# Altium PCB optic_fiber.PcbDoc
Units mil, origin at the board's own origin, x right, y up, seen from the top; angles counter-clockwise.
Board outline 1200 x 1690 mil, 4 copper layers (Top Layer, Layer 1, Layer 2, Bottom Layer), stack 21.709 mil thick; 12 components, 8 nets, 75 pads, 4 vias.
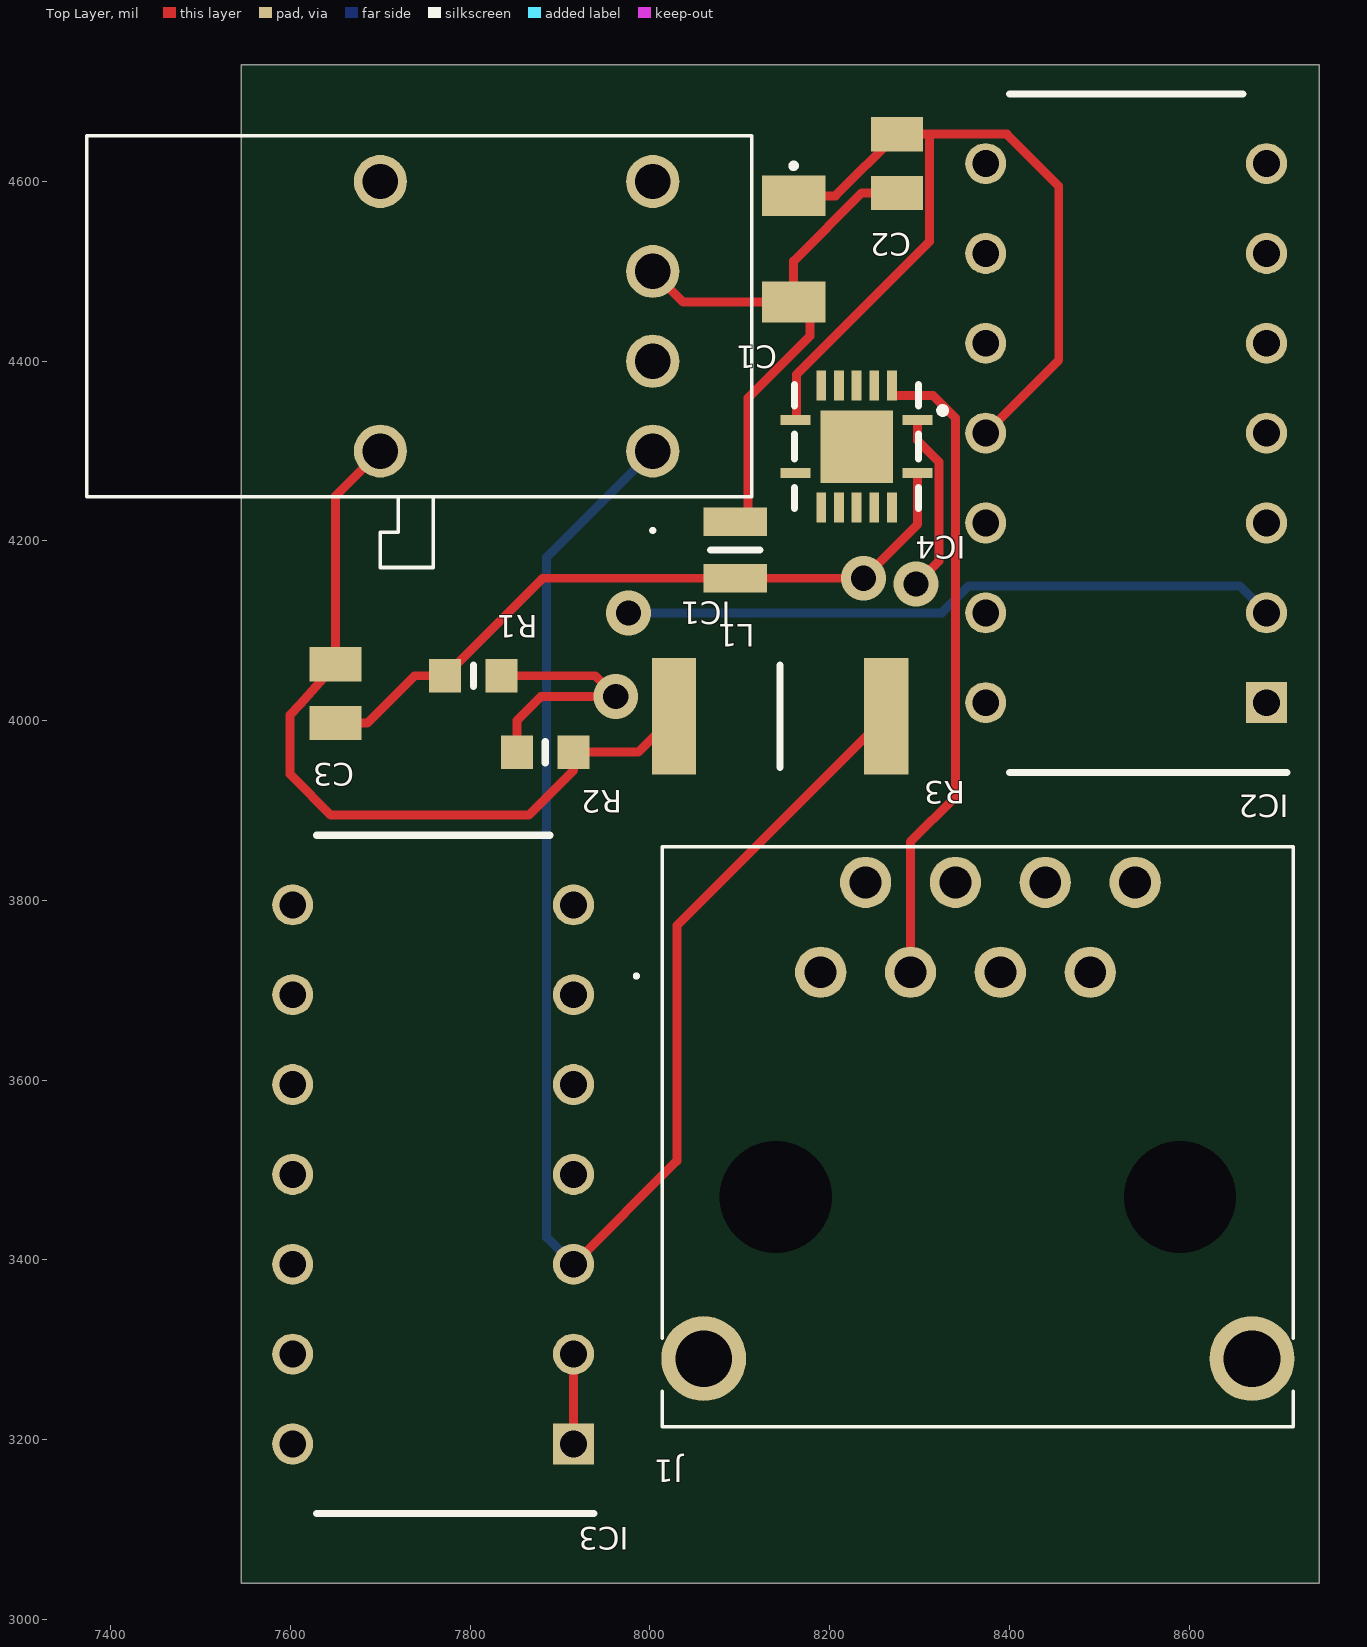
[diagram p0: Top Layer view]
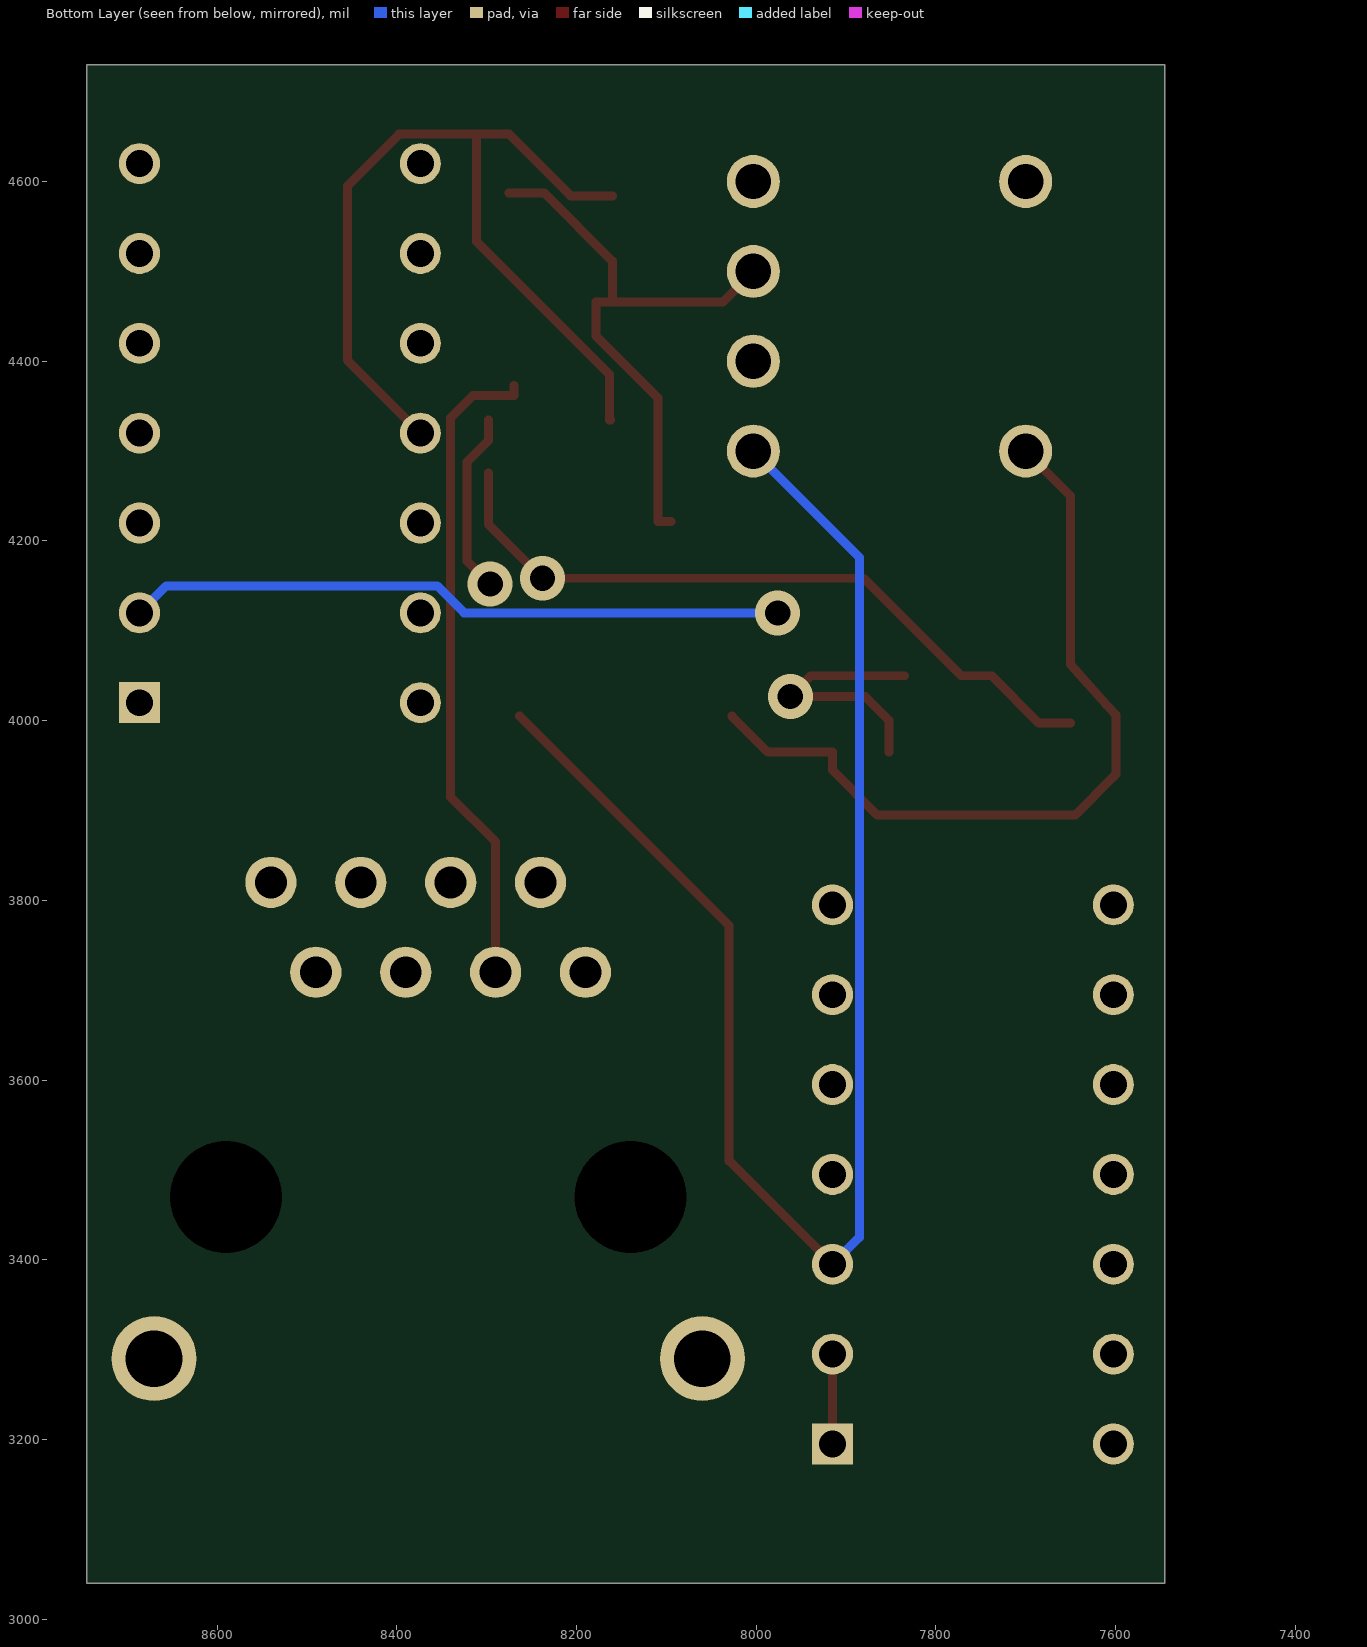
[diagram p1: Bottom Layer view, seen from below]
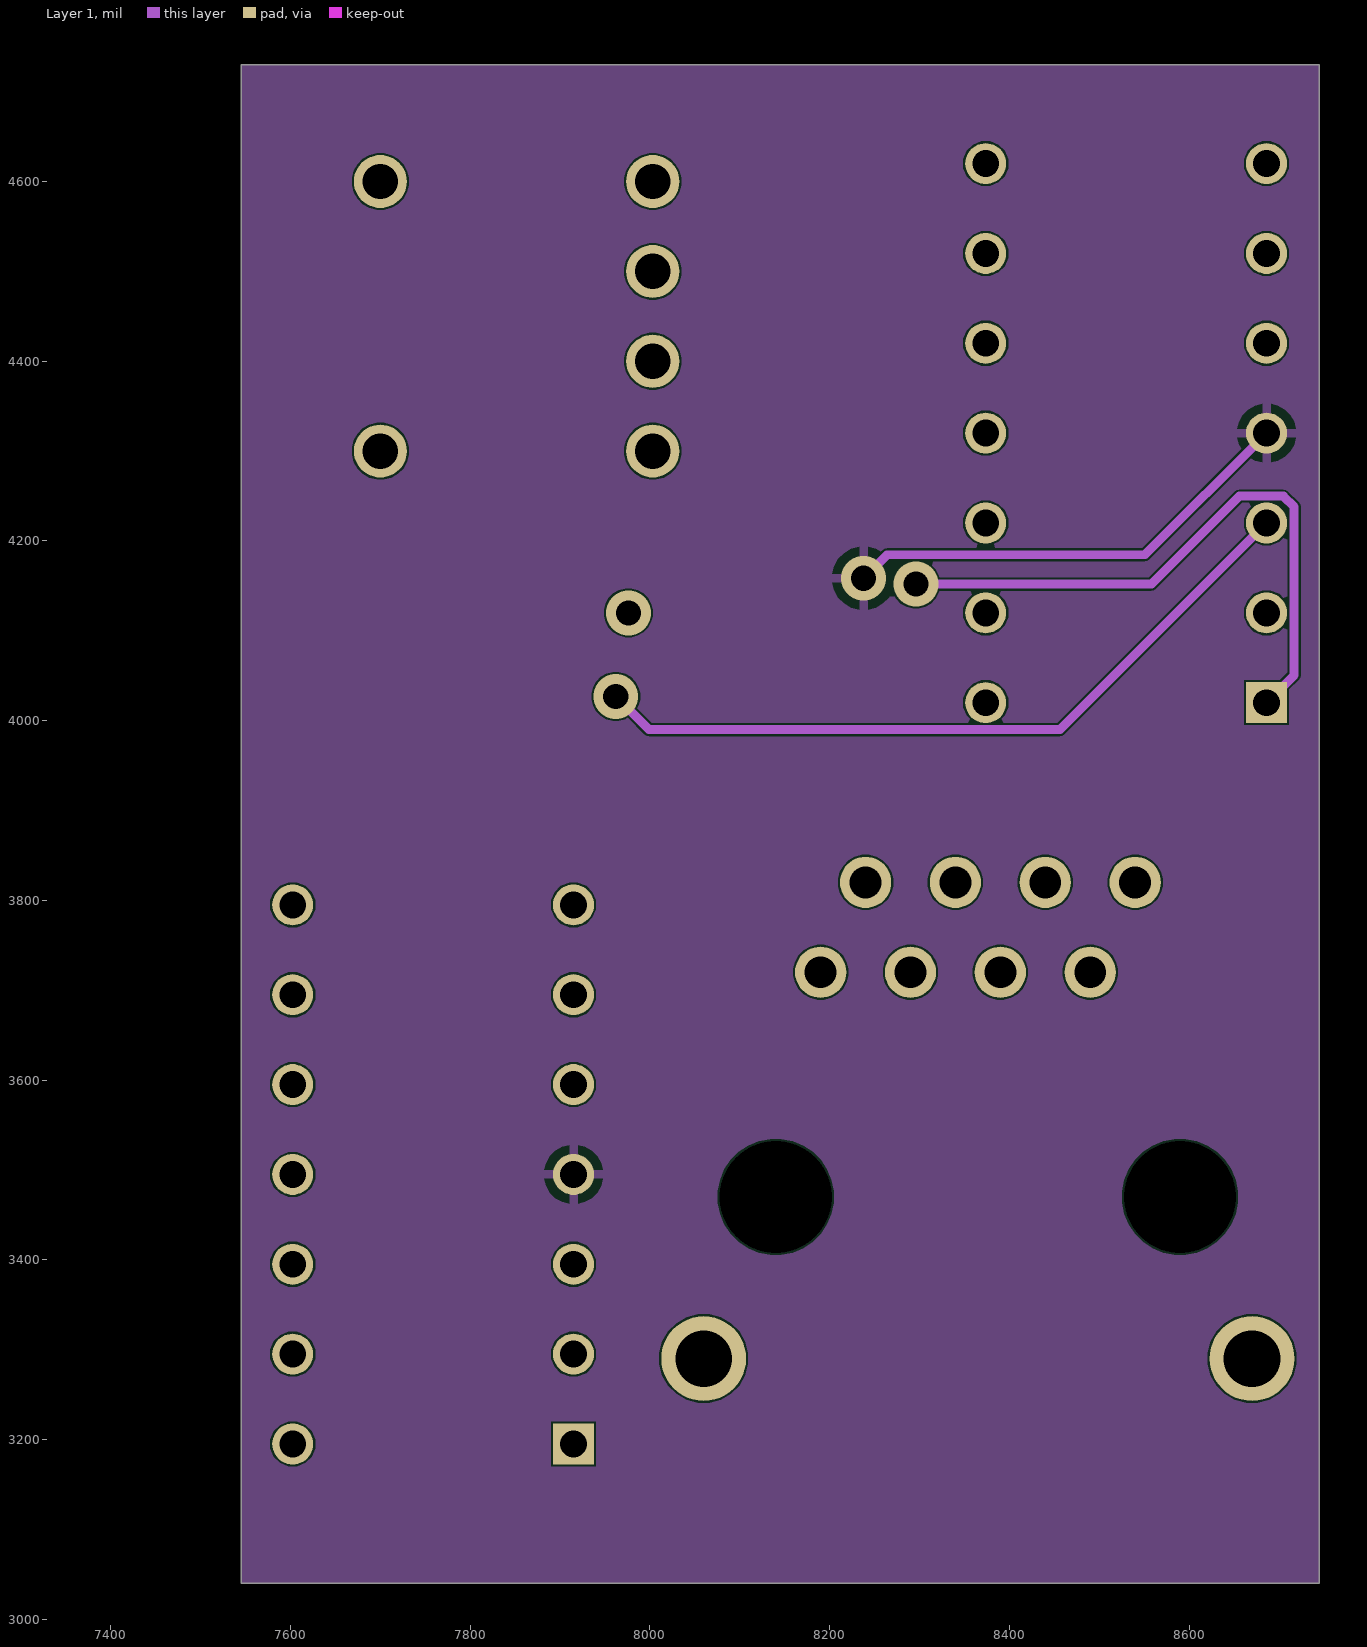
[diagram p2: Layer 1]
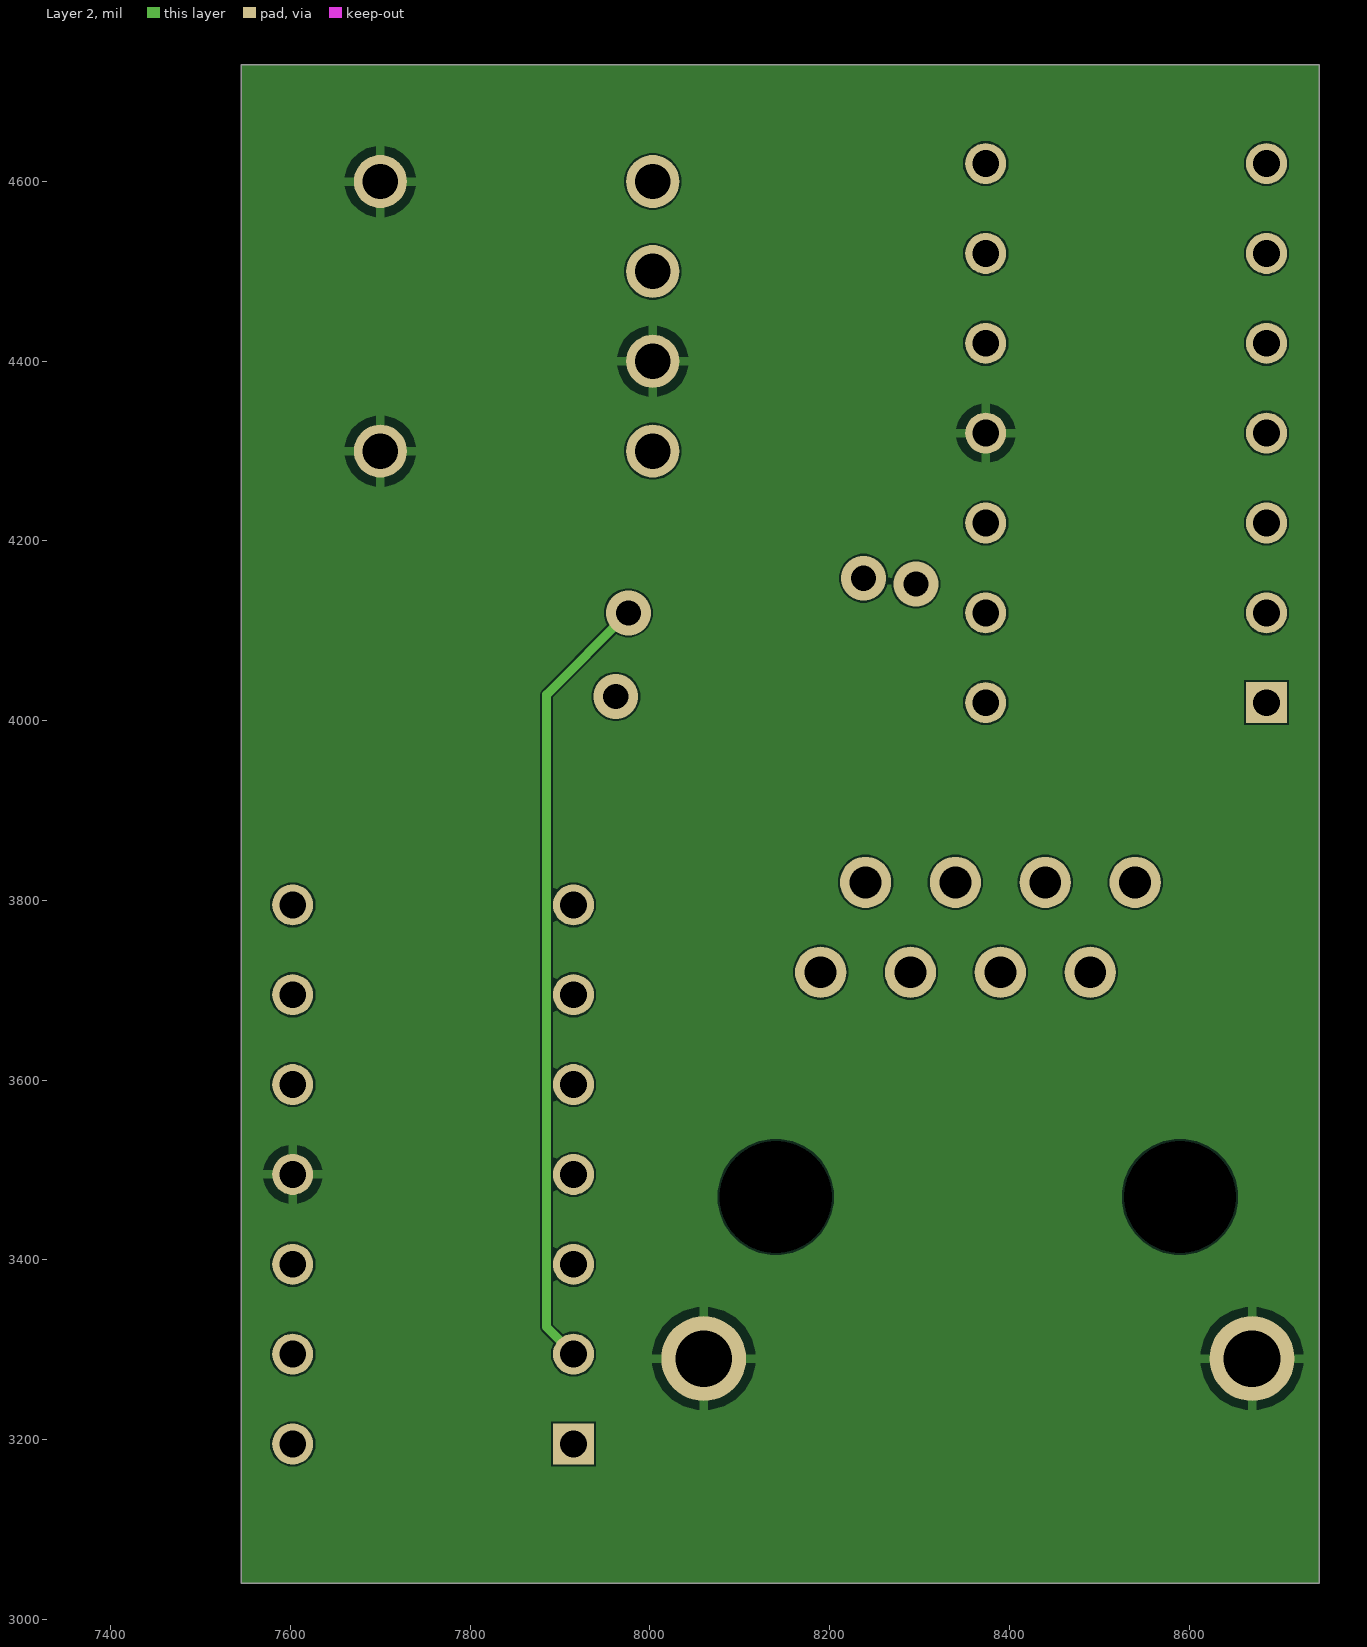
[diagram p3: Layer 2]
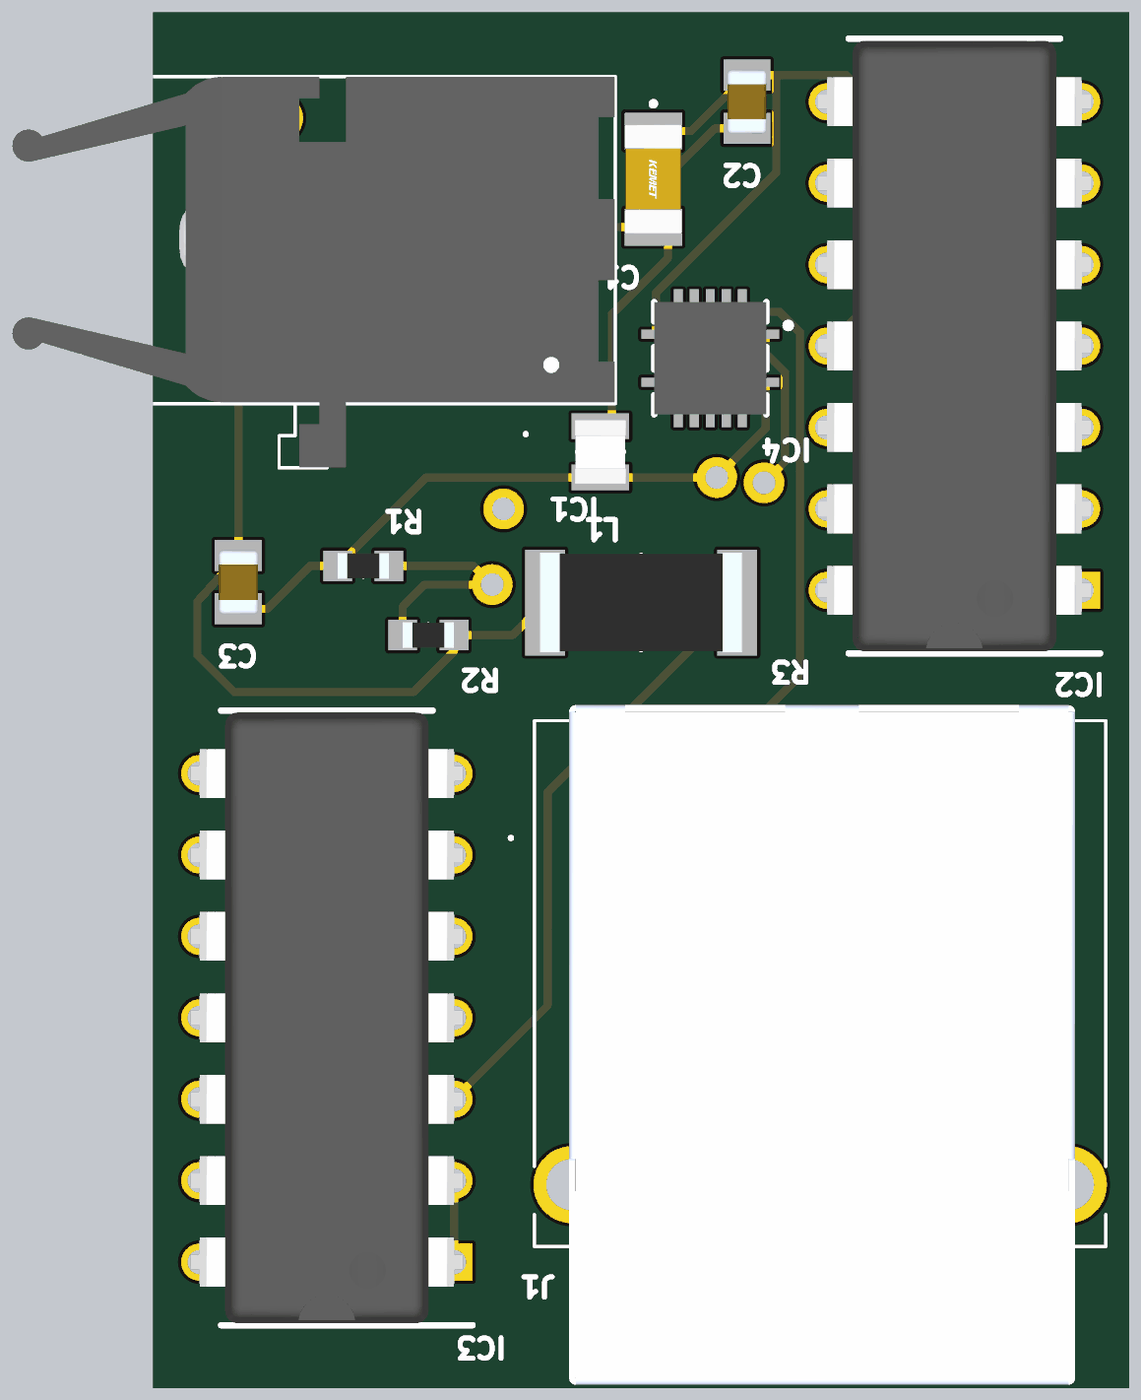
[diagram p4: 3D render of the assembled board from above, using the file's embedded part models]

## Layer stack, top to bottom
Top Solder: solder mask 0.4, Solder Resist, Dk 3.5
Top Layer: signal copper 1.4
Dielectric 2: prepreg 2.8, PP-006, Dk 4.1
Layer 1: signal copper 0.3543
Dielectric 1: dielectric 12.6, FR-4, Dk 4.8
Layer 2: signal copper 0.3543
Dielectric 3: prepreg 2.8, PP-006, Dk 4.1
Bottom Layer: signal copper 1.4
Bottom Solder: solder mask 0.4, Solder Resist, Dk 3.5

## Board outline
8745,4730 8745,3040 7545,3040 7545,4730

## Design rules (kind name [scope] priority, off if disabled: settings)
Clearance [All] p1: gap=2 ignorepadtopadclearanceinfootprint=FALSE
PolygonConnect [All] p1: connectstyle=Relief reliefconductorwidth=10 reliefentries=4 polygonreliefangle="90 Angle" airgapwidth=10
RoutingVias [All] p1: holewidth=28 width=50 viastyle="Through Hole" minholewidth=28 minwidth=50 maxholewidth=28 maxwidth=50
SolderMaskExpansion [All] p1: expansion=4 istentingtop=FALSE
Width [All] p1: maxlimit=10 minlimit=2 preferedwidth=10 midlayer1_minwidth=10 midlayer2_minwidth=10 minimp=50.000000 maximp=50.000000 favimp=50.000000
30 further rules are at their usual default settings.

## Classes and differential pairs
component class optic_fiber: C1 C2 C3 IC1 IC2 IC3 J1 L1 R2 R3

## Components (designator, comment, footprint, x,y, rotation, side; value= is the part's Value field where it differs from the comment)
C1 "C1206C104K2RACTU" C1206 8160,4525 r270 top
C2 "GRM21BR61A106KE19L" CAPC2012X145N 8275,4620 r270 top
C3 "GRM21BR61A106KE19L" CAPC2012X145N 7650,4030 r270 top
IC1 "AFBR-2624Z" AFBR2624Z 8003.15,4300 r270 top
IC2 "LM324N_NOPB" DIP794W56P254L1905H533Q14N 8530,4320 r180 top
IC3 "LM324N_NOPB" DIP794W56P254L1905H533Q14N 7758.74,3495 r180 top
IC4 "SN74LVC14ARGYR" RGY-(S-PVQFN-N14) 8230,4305 r180 top
J1 "61500814221" 61500814221 8190,3720 r0 top
L1 "LQM2MPN1R0NG0L" LQM2MPN1R0NG0L 8095,4190 r270 top
R1 "CR0603-FX-1003HLF" RESC1608X55N 7803.5,4050 r180 top
R2 "CR0603-FX-1003HLF" RESC1608X55N 7883.5,3965 r180 top
R3 "CR2512-JW-511ELF" RESC6331X75N 8145,4005 r0 top

## Footprints (in the part's own frame and the unit in brackets; to place one, negate y for a bottom-side part, rotate by r counter-clockwise, add the part's x,y. Pads: shape width x height; smd on the part's side, far side on the other; paste and mask are expansions set on the pad)
61500814221 [mm]
  round 1.45 hole 0.9: 1(0,0) 2(1.27,2.54) 3(2.54,0) 4(3.81,2.54) 5(5.08,0) 6(6.35,2.54) 7(7.62,0) 8(8.89,2.54)
  round 2.4 hole 1.6: MH1(-3.305,-10.92) MH2(12.195,-10.92)
  round 1.585 hole 3.17 unplated: MH3(-1.27,-6.35) MH4(10.16,-6.35)
  silkscreen extent -5.26,-12.85 13.37,3.55, body extent -3.39,-17.16 12.41,4.04, height 13.6
AFBR2624Z [mm]
  round 1.5 hole 1: 1(0,0) 2(-2.54,0) 3(-5.08,0) 4(-7.62,0) 5(-7.62,-7.7) 8(0,-7.7)
  silkscreen extent -8.91,-16 3.29,2.8, body extent -8.91,-16.02 3.28,2.78, height 7.59
C1206 [mm]
  rect 1.15x1.8 smd: 1(-1.5,0) 2(1.5,0)
  silkscreen extent -2.4,-0.05 -2.3,0.05, body extent -1.7,-0.9 1.7,0.9, height 1.75
CAPC2012X145N [mm]
  rect 0.97x1.47 smd: 1(-0.83,0) 2(0.83,0)
  body extent -1,-0.63 1,0.63, height 1.45
DIP794W56P254L1905H533Q14N [mil]
  rect 45.63x45.63 hole 29.88: 1(-156.26,300)
  round 45.63 hole 29.88: 2(-156.26,200) 3(-156.26,100) 4(-156.26,0) 5(-156.26,-100) 6(-156.26,-200) 7(-156.26,-300) 8(156.26,-300) 9(156.26,-200) 10(156.26,-100) 11(156.26,0) 12(156.26,100) 13(156.26,200) 14(156.26,300)
  silkscreen extent -179,-377 130,377, body extent -167,-375 167,375, height 172
LQM2MPN1R0NG0L [mm]
  rect 0.8x1.8 smd: 1(-0.8,0) 2(0.8,0)
  silkscreen extent 0,-0.7 0,0.7, body extent -1,-0.8 1,0.8, height 0.9
RESC1608X55N [mm]
  rect 0.9x0.95 smd: 1(-0.8,0) 2(0.8,0)
  silkscreen extent 0,-0.3 0,0.3, body extent -0.8,-0.4 0.8,0.4, height 0.55
RESC6331X75N [mm]
  rect 1.25x3.3 smd: 1(-3,0) 2(3,0)
  silkscreen extent 0,-1.45 0,1.45, body extent -3.15,-1.55 3.15,1.55, height 0.75
RGY-(S-PVQFN-N14) [mm]
  rect 0.85x0.28 smd: 1(-1.725,-0.75) 7(1.725,-0.75) 8(1.725,0.75) 14(-1.725,0.75)
  rect 0.28x0.85 smd: 2(-1,-1.725) 3(-0.5,-1.725) 4(0,-1.725) 5(0.5,-1.725) 6(1,-1.725) 9(1,1.725) 10(0.5,1.725) 11(0,1.725) 12(-0.5,1.725) 13(-1,1.725)
  rect 2.05x2.05 smd: 15(0,0)
  silkscreen extent -2.51,-1.75 1.75,1.75, body extent -1.75,-1.75 1.75,1.75, height 0.97

## Part data
C1: "Capacitor", Manufacturer_Name=KEMET, Mouser Part Number=80-C1206C104K2R, Arrow Part Number=C1206C104K2RACTU, Arrow Price/Stock=https://www.arrow.com/en/products/c1206c104k2ractu/kemet-corporation, Datasheet Link=https://content.kemet.com/datasheets/KEM_C1002_X7R_SMD.pdf, Manufacturer_Part_Number=C1206C104K2RACTU, Mouser Price/Stock=https://www.mouser.co.uk/ProductDetail/KEMET/C1206C104K2RACTU?qs=LfA%2FWGvkQbaiouETLouDXw%3D%3D
C2 C3: "Capacitor", Manufacturer_Name="Murata Electronics", Mouser Part Number=81-GRM21BR61A106KE19, Arrow Part Number=GRM21BR61A106KE19L, Arrow Price/Stock=https://www.arrow.com/en/products/grm21br61a106ke19l/murata-manufacturing, Datasheet Link=http://www.murata.com/~/media/webrenewal/support/library/catalog/products/capacitor/mlcc/c02e.pdf, Height=1.45mm, Manufacturer_Part_Number=GRM21BR61A106KE19L, Mouser Price/Stock=https://www.mouser.co.uk/ProductDetail/Murata-Electronics/GRM21BR61A106KE19L?qs=0E7Ycue1i8BtcgA7MBjH8A%3D%3D
IC1: "Integrated Circuit", Manufacturer_Name="Avago Technologies", Mouser Part Number=630-AFBR-2624Z, Datasheet Link=https://docs.broadcom.com/doc/AV02-4369EN, Height=7.6mm, Manufacturer_Part_Number=AFBR-2624Z, Mouser Price/Stock=https://www.mouser.co.uk/ProductDetail/Broadcom-Avago/AFBR-2624Z?qs=60YbxKv0rtDJIJtl89oIpg%3D%3D
IC2 IC3: "Integrated Circuit", Arrow Part Number=LM324N/NOPB, Manufacturer_Name="Texas Instruments", Mouser Part Number=926-LM324N/NOPB, Arrow Price/Stock=https://www.arrow.com/en/products/lm324nnopb/texas-instruments?region=nac, Datasheet Link=http://www.ti.com/general/docs/lit/getliterature.tsp?genericPartNumber=LM324-N&fileType=pdf&HQS=ti-null-null-sf-df-pf-sep-wwe&DCM=yes, Height=5.334mm, Manufacturer_Part_Number=LM324N/NOPB, Mouser Price/Stock=https://www.mouser.co.uk/ProductDetail/Texas-Instruments/LM324N-NOPB?qs=X1J7HmVL2ZGOUbLumEeh2Q%3D%3D
IC4: "Integrated Circuit", Manufacturer_Name="Texas Instruments", Mouser Part Number=595-SN74LVC14ARGYR, Arrow Part Number=SN74LVC14ARGYR, Arrow Price/Stock=https://www.arrow.com/en/products/sn74lvc14argyr/texas-instruments?region=nac, Datasheet Link=http://www.ti.com/lit/gpn/sn74lvc14a, Manufacturer_Part_Number=SN74LVC14ARGYR, Mouser Price/Stock=https://www.mouser.co.uk/ProductDetail/Texas-Instruments/SN74LVC14ARGYR?qs=xJkDX%2FqrskODEoucJ5DYNg%3D%3D
J1: "Connector", Manufacturer_Name="Wurth Elektronik", Mouser Part Number=710-61500814221, Datasheet Link=http://katalog.we-online.de/em/datasheet/61500814221.pdf, Height=16.53mm, Manufacturer_Part_Number=61500814221, Mouser Price/Stock=https://www.mouser.co.uk/ProductDetail/Wurth-Elektronik/61500814221?qs=rS3zZhy2AQOW6FITBQg0lg%3D%3D
L1: "Inductor", Manufacturer_Name="Murata Electronics", Mouser Part Number=81-LQM2MPN1R0NG0L, Arrow Part Number=LQM2MPN1R0NG0L, Arrow Price/Stock=https://www.arrow.com/en/products/lqm2mpn1r0ng0l/murata-manufacturing?region=nac, Datasheet Link=https://psearch.en.murata.com/inductor/product/LQM2MPN1R0NG0%23.html, Height=1mm, Manufacturer_Part_Number=LQM2MPN1R0NG0L, Mouser Price/Stock=https://www.mouser.co.uk/ProductDetail/Murata-Electronics/LQM2MPN1R0NG0L?qs=%2F%252BYoplLUB5g25EfGJxCkMg%3D%3D
R1 R2: "Resistor", Manufacturer_Name=Bourns, Mouser Part Number=652-CR0603-FX1003HLF, Arrow Part Number=CR0603-FX-1003HLF, Arrow Price/Stock=https://www.arrow.com/en/products/cr0603-fx-1003hlf/bourns, Datasheet Link=https://www.bourns.com/pdfs/chpreztr.pdf, Height=0.55mm, Manufacturer_Part_Number=CR0603-FX-1003HLF, Mouser Price/Stock=https://www.mouser.com/Search/Refine.aspx?Keyword=652-CR0603-FX1003HLF
R3: "Resistor", Manufacturer_Name=Bourns, Mouser Part Number=652-CR2512-JW-511ELF, Datasheet Link=https://datasheet.datasheetarchive.com/originals/distributors/SFDatasheet-7/sf-000140163.pdf, Height=0.75mm, Manufacturer_Part_Number=CR2512-JW-511ELF, Mouser Price/Stock=https://www.mouser.co.uk/ProductDetail/Bourns/CR2512-JW-511ELF?qs=DRGWdQRZRTUCe2ujtuVbwQ%3D%3D

## Via types
v1: diameter 50, hole 28, Top Layer to Bottom Layer, 4 vias

## Nets (pads, with @x,y where several pads share a name; then routed paths per layer and width w, separated by ;. In a path a pad name is that pad's centre, name@x,y a point inside that pad or via, vN(x,y) a via of type N, cw(c..) or ccw(c..) an arc to the next point about the centre after c; other vN are vias at no path point)
+5: C3.2 IC2.4 IC3.4 IC4.14 L1.2 R1.2 | length 1311.9
  Top Layer w10: C3.2 7685.32,3997.32 7738,4050 R1.2 7880.51,4158.5 L1.2 v1(8237.84,4158.5) 8298,4218.66 8298,4275.47 IC4.14
  Layer 1 w10: v1(8237.84,4158.5) 8264,4184.66 8550.92,4184.66 IC2.4
"Current Output": IC1.1 IC3.3 R3.2 | length 1720.6
  Top Layer w10: IC3.3 8030,3510 8030,3771.89 R3.2
  Bottom Layer w10: IC3.3 7885,3425 7885,4181.85 IC1.1
GND: C1.1 C2.1 C3.1 IC1.2 IC1.5 IC1.8 IC2.11 IC3.11 IC4.7 J1.MH1 J1.MH2 R2.1 R3.1 | length 1939.3
  Top Layer w10: IC1.8 7650,4250 C3.1 7610.43,4018.1 7599.57,4006.21 7599.57,3940.43 7602.5,3937.5 7645,3895 7865,3895 7915,3945 R2.1 7986.89,3965 R3.1 ; C1.1 8206.38,4584.06 C2.1 8311,4652.68 ; IC4.7 8163,4334.53 8163,4385 8311,4533 8311,4652.68 ; IC2.11 8455,4401.26 8455,4595 8397.32,4652.68 8311,4652.68
NetC1_2: C1.2 C2.2 IC1.3 L1.1 | length 667.8
  Top Layer w10: IC1.3 8037.21,4465.94 C1.2 ; L1.1 8109,4221.5 8109,4359 8178,4428 8178,4465.94 C1.2 ; C2.2 8236,4587.32 8160,4511.32 C1.2
NetIC2_3: IC2.3 R1.1 R2.2 | length 1127.6
  Top Layer w10: R1.1 7939,4050 v1(7962,4027) 7879.02,4027 7852.01,3999.99 R2.2
  Layer 1 w10: v1(7962,4027) 7999,3990 8456.26,3990 IC2.3
"ON/OF Output": IC4.2 J1.3 | length 729.6
  Top Layer w10: IC4.2 8269.37,4362 8315,4362 8340,4337 8340,3915 8290,3865 J1.3
"ON/OF Output (invert)": IC2.1 IC4.1 | length 900.3
  Top Layer w10: v1(8296,4152) 8321.65,4177.65 8321.65,4288 8297.91,4311.73 IC4.1
  Layer 1 w10: v1(8296,4152) 8558,4152 8656,4250 8705,4250 8717,4238 8717,4050.74 IC2.1
"Voltage Output": IC2.2 IC3.1 IC3.2 | length 1710.2
  Top Layer w10: IC3.1 IC3.2
  Layer 2 w10: IC3.2 7885,3325 7885,4029 v1(7976,4120)
  Bottom Layer w10: v1(7976,4120) 8325,4120 8355,4150 8656.26,4150 IC2.2
pads on no net: IC1.4 IC2.5 IC2.6 IC2.7 IC2.8 IC2.9 IC2.10 IC2.12 IC2.13 IC2.14 IC3.5 IC3.6 IC3.7 IC3.8 IC3.9 IC3.10 IC3.12 IC3.13 IC3.14 IC4.3 IC4.4 IC4.5 IC4.6 IC4.8 IC4.9 IC4.10 IC4.11 IC4.12 IC4.13 IC4.15 J1.1 J1.2 J1.4 J1.5 J1.6 J1.7 J1.8 J1.MH3 J1.MH4

## Polygon pours and split planes (outlines as drawn)
+5 on Layer 1 "+5_L02_P000" (solid, pour order 0): 8745,3040 7545,3040 7545,4730 8745,4730
GND on Layer 2 "GND_L03_P001" (solid, pour order 1): 8745,3040 7545,3040 7545,4730 8745,4730

## Other copper
Top Layer:
  text "Optic fiber receiver with ON/OF communication. current voltage converter circuit of logic values. Logic value approximation circuit: Vrx > 2.5V, logical value 1   Vrx < 2.5V, logical value 0" at 7535,2740 h40